# Altium PCB ld_monitoring_decoupling.PcbDoc
Units mm, origin at the board's own origin, x right, y up, seen from the top; angles counter-clockwise.
Board outline 10.25 x 14.75 mm, 4 copper layers (Top Layer, Layer 1 (GND), Layer 2 (PWR), Bottom Layer), stack 0.921 mm thick; 35 components, 26 nets, 110 pads, 54 vias.
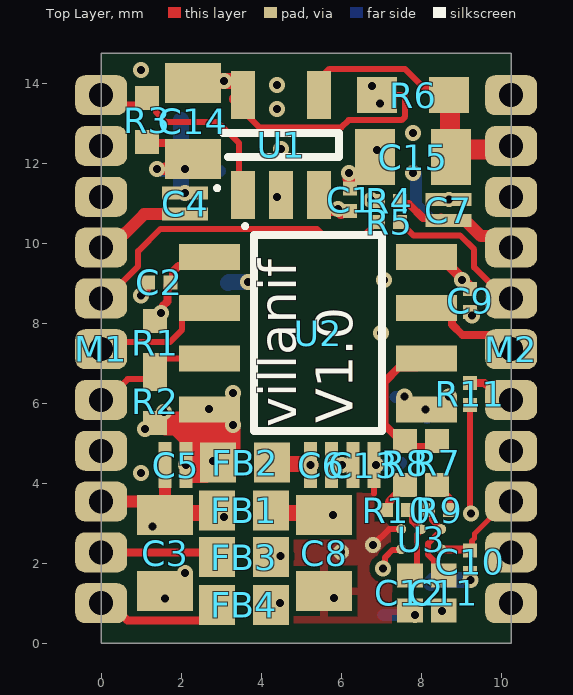
[diagram p0: Top Layer view]
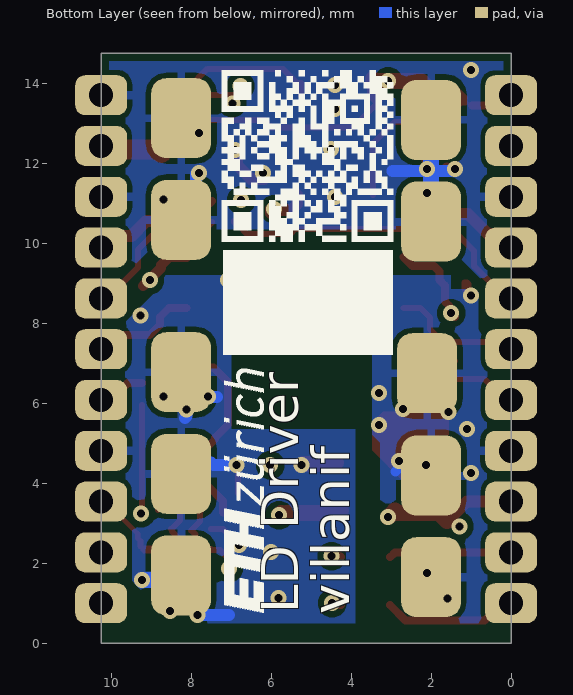
[diagram p1: Bottom Layer view, seen from below]
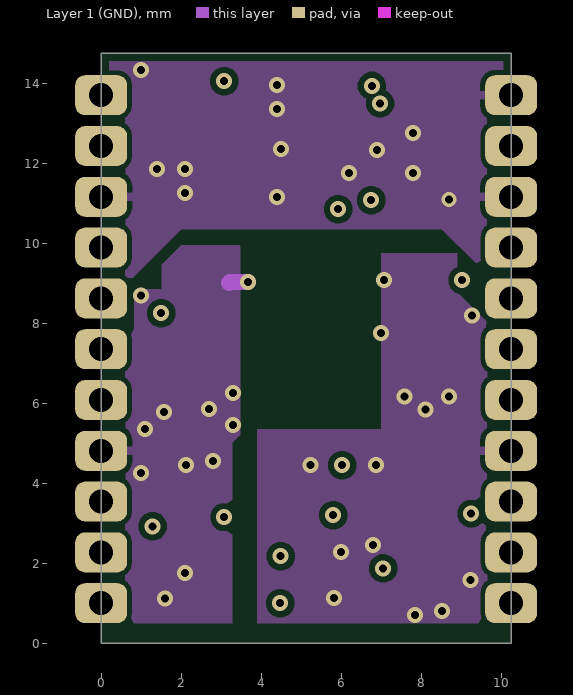
[diagram p2: Layer 1 (GND)]
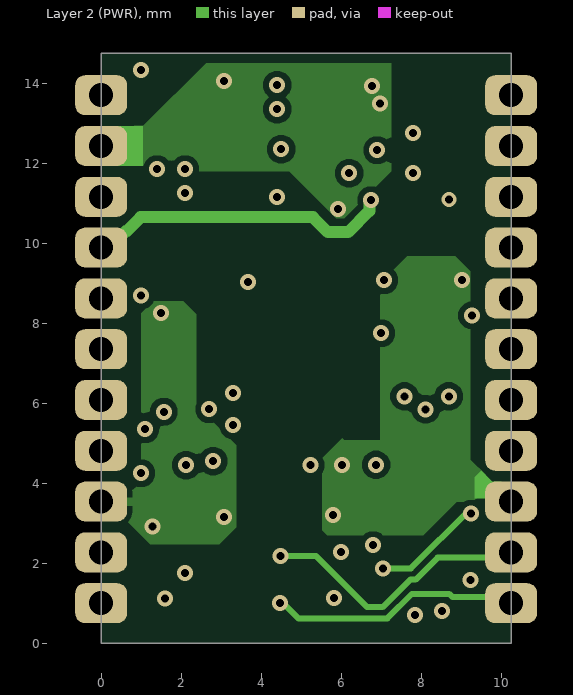
[diagram p3: Layer 2 (PWR)]

## Layer stack, top to bottom
Top Solder: solder mask 0.0127, Solder Resist, Dk 3.8
Top Layer: signal copper 0.035
Dielectric 1: prepreg 0.2104, 7628, Dk 4.5
Layer 1 (GND): signal copper 0.0152
Core: core 0.4, FR-4, Dk 4.5
Layer 2 (PWR): signal copper 0.0152
Dielectric 2: prepreg 0.2104, 7628, Dk 4.5
Bottom Layer: signal copper 0.035
Bottom Solder: solder mask 0.0127, Solder Resist, Dk 3.8

## Board outline
0,0 0,14.75 10.25,14.75 10.25,0

## Design rules (kind name [scope] priority, off if disabled: settings)
AcuteAngle [All] p1: minimum=4.50000000000000E+0001 checktracksonly=FALSE
BoardOutlineClearance [All] p1: gap=0.2 ignorepadtopadclearanceinfootprint=FALSE
Clearance [All] p1: gap=0.12 ignorepadtopadclearanceinfootprint=FALSE except(0.102: Arc-Text Track-Text SMDPad-Text THPad-Text Fill-Text Poly-Text Region-Text Text-Text; 0.127: THPad-Via Via-Text; 0.13: Arc-Arc Arc-Track Arc-SMDPad Track-Track Track-SMDPad SMDPad-SMDPad; 0.15: Arc-Via Track-Via SMDPad-Via Via-Fill Via-Poly Via-Region; 0.2: Arc-THPad Track-THPad SMDPad-THPad THPad-THPad Via-Via; 0.25: Arc-Hole Track-Hole SMDPad-Hole THPad-Hole Via-Hole Fill-Hole Poly-Hole Region-Hole Text-Hole)
ComponentClearance [All] p1: gap=0.102 collisioncheckmode=3 verticalgap=0.102 showdistances=TRUE
DiffPairsRouting [All] p1: maxlimit=0.102 minlimit=0.102 mostfreqgap=0.102 toplayer_minwidth=0.102 toplayer_maxwidth=1816.048 toplayer_prefwidth=0.102 midlayer1_minwidth=0.102 midlayer1_maxwidth=1816.048 midlayer1_prefwidth=0.102 midlayer2_minwidth=0.102 midlayer2_maxwidth=1816.048 midlayer2_prefwidth=0.102 bottomlayer_minwidth=0.102 bottomlayer_maxwidth=1816.048 bottomlayer_prefwidth=0.102 maxuncoupledlength=12.7
Height [All] p1: minheight=0 maxheight=1816.048 prefheight=12.7
HoleSize [All] p1: absolutevalues=TRUE maxlimit=6.3 minlimit=0.2 maxpercent=80.000 minpercent=20.000
HoleToHoleClearance [All] p1: gap=0.25 allowstackedmicrovias=FALSE
MinimumAnnularRing [All] p1: minimumring=0.076
MinimumSolderMaskSliver [All] p1: minsoldermaskwidth=0.1
PlaneClearance [All] p1: clearance=0.102
PlaneConnect PlaneConnectPowerPads [InPadClass('PowerPads')] p1: planeconnectstyle=Direct reliefexpansion=0.508 reliefentries=4 reliefconductorwidth=0.254 reliefairgap=0.254
PlaneConnect [All] p2: pad.planeconnectstyle=Relief pad.reliefexpansion=0.3 pad.reliefentries=4 pad.reliefconductorwidth=0.2 pad.reliefairgap=0.12 via.planeconnectstyle=Direct via.reliefexpansion=0.3 via.reliefentries=4 via.reliefconductorwidth=0.127 via.reliefairgap=0.127
PolygonConnect PolygonConnectPowerPads [All vs (InPadClass('PowerPads'))] p1: connectstyle=Direct reliefconductorwidth=0.254 reliefentries=4 polygonreliefangle="90 Angle" airgapwidth=0.254
PolygonConnect [All] p2: thpad.connectstyle=Relief thpad.reliefconductorwidth=0.2 thpad.reliefentries=4 thpad.polygonreliefangle="90 Angle" thpad.airgapwidth=0.13 smdpad.connectstyle=Relief smdpad.reliefconductorwidth=0.2 smdpad.reliefentries=4 smdpad.polygonreliefangle="90 Angle" smdpad.airgapwidth=0.13 via.connectstyle=Direct via.reliefconductorwidth=0.127 via.reliefentries=4 via.polygonreliefangle="90 Angle" via.airgapwidth=0.127
RoutingVias [All] p1: holewidth=0.2 width=0.45 viastyle="Through Hole" minholewidth=0.2 minwidth=0.35 maxholewidth=6.3 maxwidth=6.55
SilkToSilkClearance [All] p1: silktosilkclearance=0
SilkToSolderMaskClearance [IsPad] p1: minsilkscreentomaskgap=0.05 clearancetoexposedcopper=TRUE
SolderMaskExpansion SolderMaskExpansion_1 [IsVia] p1: expansion=0 istentingtop=TRUE
SolderMaskExpansion [All] p2: expansion=0 istentingtop=FALSE
SupplyNets "Schematic Supply Nets_8" [InNet('3V3_P')] p1: voltage=0.000
SupplyNets "Schematic Supply Nets_7" [InNet('AGND_G')] p2: voltage=0.000
SupplyNets "Schematic Supply Nets_6" [InNet('V5V')] p3: voltage=0.000
SupplyNets "Schematic Supply Nets_5" [InNet('V_LASER_G')] p4: voltage=0.000
SupplyNets "Schematic Supply Nets_4" [InNet('AGND')] p5: voltage=0.000
SupplyNets "Schematic Supply Nets_3" [InNet('3V3_PG')] p6: voltage=0.000
SupplyNets "Schematic Supply Nets_2" [InNet('PGND')] p7: voltage=0.000
SupplyNets "Schematic Supply Nets_1" [InNet('V5V_G')] p8: voltage=0.000
SupplyNets "Schematic Supply Nets" [InNet('V_LASER')] p9: voltage=0.000
Width [All] p1: maxlimit=1816.048 minlimit=0.1 preferedwidth=0.15
20 further rules are at their usual default settings.

## Components (designator, comment, footprint, x,y, rotation, side; value= is the part's Value field where it differs from the comment)
C1 "0.1uF" "CAP 0201_0603" 6.225,11.085 r90 top
C2 "0.1uF" "CAP 0201_0603" 1.45,9.02 r180 top
C3 "4.7uF" "CAP 0805_2012" 1.6,2.25 r90 top
C4 "1uF" FP-LLL152-0_2-MFG 2.1,10.987 r270 top
C5 "1uF" FP-LLL152-0_2-MFG 1.862,4.45 r180 top
C6 "1uF" FP-LLL152-0_2-MFG 5.5,4.45 r0 top
C7 "1uF" FP-LLL152-0_2-MFG 8.681,10.828 r270 top
C8 "4.7uF" "CAP 0805_2012" 5.575,2.25 r90 top
C9 "0.1uF" "CAP 0201_0603" 9.222,8.563 r90 top
C10 "0.1uF" "CAP 0201_0603" 9.225,2.035 r90 top
C11 "20 pF" "CAP 0402_1005" 8.562,1.255 r90 top
C12 "20 pF" "CAP 0402_1005" 7.72,1.255 r90 top
C13 "1uF" FP-LLL152-0_2-MFG 6.562,4.45 r180 top
C14 "4.7uF" "CAP 0805_2012" 2.3,13.05 r90 top
C15 "4.7uF" "CAP 0805_2012" 7.8,12.15 r0 top
FB1 "1 kOhms @ 100 MHz" "FER 0603_1608" 3.575,3.312 r0 top
FB2 "1 kOhms @ 100 MHz" "FER 0603_1608" 3.6,4.512 r0 top
FB3 "1 kOhms @ 100 MHz" "FER 0603_1608" 3.575,2.15 r0 top
FB4 "1 kOhms @ 100 MHz" "FER 0603_1608" 3.575,0.95 r0 top
M1 "Castellated_11" Castellated_ 0,7.35 r180 top
M2 "Castellated_11" Castellated_ 10.25,7.35 r0 top
R1 "4.99 k" "RES 0402_1005" 1.35,7.5 r90 top
R2 "4.99 k" "RES 0402_1005" 1.35,6.05 r90 top
R3 "10k" "RES 0402_1005" 1.15,13.075 r90 top
R4 "0" "RES 0201_0603" 7.2,11.05 r0 top
R5 "0" "RES 0201_0603" 7.197,10.528 r0 top
R6 "33mR" "STACKPOLE CSR0603" 7.8,13.7 r180 top
R7 "0" "RES 0402_1005" 8.4,4.5 r270 top
R8 "0" "RES 0402_1005" 7.6,4.5 r270 top
R9 "4.99 k" "RES 0201_0603" 8.45,3.325 r180 top
R10 "4.99 k" "RES 0201_0603" 7.4,3.325 r0 top
R11 "24" "RES 0201_0603" 9.225,6.225 r90 top
U1 "INA139NA_3K" SOT95P280X145-5N 4.5,12.45 r90 top
U2 "MAX22291CASA_V+" SOIC127P600X175-8N 5.425,7.75 r0 top
U3 "SN74LVC1G08YZPR" YZP0005ADAD 8,2.6 r270 top

## Footprints (in the part's own frame and the unit in brackets; to place one, negate y for a bottom-side part, rotate by r counter-clockwise, add the part's x,y. Pads: shape width x height; smd on the part's side, far side on the other; paste and mask are expansions set on the pad)
"CAP 0201_0603" [mm] "Chip Capacitor, 2-Leads, Body 0.60x0.30mm, IPC Medium Density"
  rect 0.35x0.35 smd: 1(-0.285,0) 2(0.285,0)
  body extent -0.3,-0.15 0.3,0.15, height 0.3
"CAP 0402_1005" [mm] "Chip Capacitor, 2-Leads, Body 1.02x0.51mm, IPC Medium Density"
  rect 0.6x0.64 smd: 1(-0.44,0) 2(0.44,0)
  body extent -0.5,-0.26 0.5,0.26, height 0.52
"CAP 0805_2012" [mm] "Chip Capacitor, 2-Leads, Body 2.00x1.20mm, IPC Medium Density"
  rect 1x1.4 smd: 1(-0.95,0) 2(0.95,0)
  body extent -1,-0.64 1,0.64, height 1.26
Castellated_ [mm] "Castellated holes, 11 pin, 0.6 mm hole diameter, 1.27 mm pitch"
  rrect50% 1.3x1 hole 0.6: 1(0,6.35) 2(0,5.08) 3(0,3.81) 4(0,2.54) 5(0,1.27) 6(0,0) 7(0,-1.27) 8(0,-2.54) 9(0,-3.81) 10(0,-5.08) 11(0,-6.35)
  body extent -0.35,-6.85 0,6.85
"FER 0603_1608" [mm] "Chip Ferrite, 2-Leads, Body 1.60x0.80mm, IPC Medium Density"
  rect 0.9x1 smd: 1(-0.675,0) 2(0.675,0)
  body extent -0.8,-0.41 0.8,0.41, height 0.82
FP-LLL152-0_2-MFG [mm]
  rect 0.325x1.15 smd paste+0 mask+0: 1(-0.262,0) 2(0.262,0)
  body extent -0.53,-0.7 0.53,0.7, height 0.25
"RES 0201_0603" [mm] "Chip Resistor, 2-Leads, Body 0.60x0.30mm, IPC Medium Density"
  rect 0.35x0.35 smd: 1(-0.275,0) 2(0.275,0)
  body extent -0.3,-0.15 0.3,0.15, height 0.21
"RES 0402_1005" [mm] "Chip Resistor, 2-Leads, Body 1.0x0.5mm, IPC Medium Density"
  rect 0.6x0.6 smd: 1(-0.55,0) 2(0.55,0)
  body extent -0.5,-0.25 0.5,0.25, height 0.35
SOIC127P600X175-8N [mm]
  rect 1.525x0.65 smd: 1(-2.712,1.905) 2(-2.712,0.635) 3(-2.712,-0.635) 4(-2.712,-1.905) 5(2.712,-1.905) 6(2.712,-0.635) 7(2.712,0.635) 8(2.712,1.905)
  silkscreen extent -1.87,-2.45 1.6,2.72, body extent -3,-2.45 3,2.45, height 1.75
SOT95P280X145-5N [mm]
  rect 1.2x0.6 smd: 1(-1.25,0.95) 2(-1.25,0) 3(-1.25,-0.95) 4(1.25,-0.95) 5(1.25,0.95)
  silkscreen extent -1.12,-1.45 0.3,1.65, body extent -1.4,-1.45 1.4,1.45, height 1.2
"STACKPOLE CSR0603" [mm] "Chip Resistor, 2-Leads, Body 1.60x0.80mm, IPC Medium Density"
  rect 1x0.9 smd: 1(-0.9,0) 2(0.9,0)
  body extent -0.85,-0.4 0.85,0.4, height 0.45
YZP0005ADAD [mm] "BGA, 5-Balls, Body 1.39x0.89mm, Pitch 0.5mm"
  round 0.25 smd mask+0.03: A1(-0.25,0.5) A2(0.25,0.5) B1(-0.25,0) C1(-0.25,-0.5) C2(0.25,-0.5)
  body extent -0.45,-0.69 0.45,0.69, height 0.5

## Part data
C1 C2 C9 C10: library part GRM033R6YA104ME14D, "CAP CER 0.1UF 35V X5R 0201", Capacitance="0.1 µF", Device Package="0201 (0603 Metric)", Manufacturer="Murata Electronics", Operating Temperature="-55°C ~ 85°C", Supplier Part Number 1=490-10431-1-ND, Temperature Coefficient=X5R, Tolerance=±20%, Voltage - Rated=35V, Applications="General Purpose", ComponentLink1Description=Datasheet, ComponentLink1URL=https://search.murata.co.jp/Ceramy/image/img/A01X/G101/ENG/GRM033R6YA104ME14-01.pdf, ComponentLink2Description="DigiKey Link", ComponentLink2URL=https://www.digikey.com/en/products/detail/murata-electronics/GRM033R6YA104ME14D/5027516, lastupdated="15/07/2023 19:00:56", Lifecycle Status=Active, Minimum Order=1, Mounting Type="Surface Mount", Package / Case="0201 (0603 Metric)", Packaging=CutTape, Part Number=GRM033R6YA104ME14D, Part Status=Active, partid=17, price=0.01, series=GRM, Size / Dimension="0.024\" L x 0.012\" W (0.60mm x 0.30mm)", Supplier 1=Digi-Key, Supplier 2=Mouser, Supplier Part Number 2=81-GRM33R6YA104ME14D, Thickness (Max)="0.013\" (0.33mm)"
C3 C8 C14 C15: library part GRM21BC81H475KE11L, "CAP CER 4.7UF 50V X6S 0805", Capacitor Type=Ceramic, Case/Package=0805, Manufacturer=Murata, Max Operating Temperature=105°C, Min Operating Temperature=-55°C, Package Shape=Rectangular, Package Style=SMTMeter, Rated DC Voltage (URdc)=50V, Supplier Part Number=81-GRM21BC81H475KE1L, Supplier Part Number 1=81-GRM21BC81H475KE1K, Temperature Characteristics Code=X6S, Tolerance  (fill in as +-)=10%, Category="Ceramic Capacitors", ComponentLink1Description=https://datasheet.ciiva.com:443/pdfs/VipMasterIC/IC/MURE/MURE-S-A0004349797/MURE-S-A0004361772-1.pdf?src-supplier=IHS+Markit, ComponentLink1URL=https://datasheet.ciiva.com:443/pdfs/VipMasterIC/IC/MURE/MURE-S-A0004349797/MURE-S-A0004361772-1.pdf?src-supplier=IHS+Markit, ComponentLink2Description=http://www.mouser.com/ds/2/281/c02e-2905.pdf?src-supplier=Mouser, ComponentLink2URL=http://www.mouser.com/ds/2/281/c02e-2905.pdf?src-supplier=Mouser, ComponentLink3Description=http://search.murata.co.jp/Ceramy/image/img/A01X/G101/ENG/GRM21BC81H475KE11-01.pdf?src-supplier=Digi-Key, ComponentLink3URL=http://search.murata.co.jp/Ceramy/image/img/A01X/G101/ENG/GRM21BC81H475KE11-01.pdf?src-supplier=Digi-Key, ComponentLink4Description=https://search.murata.co.jp/Ceramy/image/img/A01X/G101/ENG/GRM21BC81H475KE11-01.pdf?src-supplier=Digi-Key, ComponentLink4URL=https://search.murata.co.jp/Ceramy/image/img/A01X/G101/ENG/GRM21BC81H475KE11-01.pdf?src-supplier=Digi-Key, Dielectric Material=Ceramic, Height=1.25mm, JESD-609 Code=e3, Length=2mm, Manufacturer Part Number=GRM21BC81H475KE11L, Mounting Technology="Surface Mount", Multilayer=Yes, Packaging="Tape and Reel", Pins=2, Pricing="1=0.29, 10=0.141, 50=0.141, 100=0.091, 1000=0.077, 10000=0.062 (USD)", Reach SVHC Compliant=Yes, RoHS=Yes, RoHS Compliant=Yes, Stock=22290, Supplier=Mouser, Supplier 1=Mouser, Terminal Finish=Nickel, Termination=Wraparound, Tolerance (fill in as +-)=10%, Width=1.25mm
C4 C5 C6 C7 C13: library part LLL152D70J105ME01D, "CAP LOW L CER 1UF 6.3V X7T 0204", Manufacturer=Murata, Supplier Part Number=81-LLL152D70J105ME01, Category="Ceramic Capacitors", Manufacturer Part Number=LLL152D70J105ME01D, Pricing="1=0.32, 10=0.173, 50=0.173, 100=0.104, 1000=0.08, 10000=0.06 (USD)", RoHS=No, Stock=241363, Supplier=Mouser, Supplier 1=Mouser, Supplier Part Number 1=81-LLL152D70J105ME01
C11 C12: library part GCM1555C1H200FA16D, "CAP CER 20PF 50V C0G/NP0 0402", Device Package="0402 (1005 Metric)", Manufacturer="Murata Electronics", Operating Temperature="-55°C ~ 125°C", Ratings=AEC-Q200, Supplier Part Number 1=490-GCM1555C1H200FA16DCT-ND, Temperature Coefficient="C0G, NP0", Tolerance=±1%, Voltage - Rated=50V, Applications=Automotive, Capacitance="20 pF", ComponentLink1Description=Datasheet, ComponentLink1URL=https://search.murata.co.jp/Ceramy/image/img/A01X/G101/ENG/GCM1555C1H200FA16-01.pdf, ComponentLink2Description="DigiKey Link", ComponentLink2URL=https://www.digikey.com/en/products/detail/murata-electronics/GCM1555C1H200FA16D/13401847, lastupdated="15/07/2023 19:03:20", Lifecycle Status=Active, Minimum Order=1, Mounting Type="Surface Mount, MLCC", Package / Case="0402 (1005 Metric)", Packaging=TapeAndReel, Part Number=GCM1555C1H200FA16D, Part Status=Active, partid=45712, price=0.01, series=GCM, Size / Dimension="0.039\" L x 0.020\" W (1.00mm x 0.50mm)", Supplier 1=Digi-Key, Supplier 2=Mouser, Supplier Part Number 2=81-GCM1555C1H200FA6D, Thickness (Max)="0.022\" (0.55mm)"
FB1 FB2 FB3 FB4: library part BLM18SP102SH1D, "FERRITE BEAD 1K OHM 0603 1LN", Current Rating (Max)=1.2A, DC Resistance (DCR) (Max)=185mOhm, Device Package="0603 (1608 Metric)", Manufacturer="Murata Electronics", Operating Temperature="-55°C ~ 125°C", Ratings=AEC-Q200, Supplier Part Number 1=490-BLM18SP102SH1DCT-ND, ComponentLink1Description=Datasheet, ComponentLink1URL=https://www.murata.com/products/productdata/8796737273886/QNFA9101.pdf, ComponentLink2Description="DigiKey Link", ComponentLink2URL=https://www.digikey.com/en/products/detail/murata-electronics/BLM18SP102SH1D/12759403, Filter Type="Power Line", Height (Max)="0.037\" (0.95mm)", Impedance @ Frequency="1 kOhms @ 100 MHz", lastupdated="13/07/2023 19:55:34", Lifecycle Status=Active, Minimum Order=1, Mounting Type="Surface Mount", Number of Lines=1, Package / Case="0603 (1608 Metric)", Packaging=TapeAndReel, Part Number=BLM18SP102SH1D, Part Status=Active, partid=2122, price=0.05, series=BLM, Size / Dimension="0.063\" L x 0.031\" W (1.60mm x 0.80mm)", Supplier 1=Digi-Key, Supplier 2=Mouser, Supplier Part Number 2=81-BLM18SP102SH1D
M1 M2: "Castellated holes, 11 pin, 0.6 mm hole diameter, 1.27 mm pitch"
R1 R2: library part ERA-2AEB4991X, "RES SMD 4.99KOHM 0.1% 1/16W 0402", Device Package="0402 (1005 Metric)", Manufacturer="Panasonic Electronic Components", Operating Temperature="-55°C ~ 155°C", Power (Watts)="0.063W, 1/16W", Ratings=AEC-Q200, Resistance="4.99 kOhms", Supplier Device Package=0402, Supplier Part Number 1=10-ERA-2AEB4991XCT-ND, Temperature Coefficient=±25ppm/°C, Tolerance=±0.1%, ComponentLink1Description=Datasheet, ComponentLink1URL=https://industrial.panasonic.com/cdbs/www-data/pdf/RDM0000/AOA0000C307.pdf, ComponentLink2Description="DigiKey Link", ComponentLink2URL=https://www.digikey.com/en/products/detail/panasonic-electronic-components/ERA-2AEB4991X/2026116, Composition="Thin Film", Features="Automotive AEC-Q200", Height - Seated (Max)="0.016\" (0.40mm)", lastupdated="13/07/2023 19:22:52", Lifecycle Status=Active, Minimum Order=1, Number of Terminations=2, Package / Case="0402 (1005 Metric)", Packaging=TapeAndReel, Part Number=ERA-2AEB4991X, Part Status=Active, partid=6112, price=0.04, series=ERA-2A, Size / Dimension="0.039\" L x 0.020\" W (1.00mm x 0.50mm)", Supplier 1=Digi-Key, Supplier 2=Mouser, Supplier Part Number 2=667-ERA-2AEB4991X
R3: library part ERJ-1GNF1002C, "RES SMD 10KOHM 0.1% 63mW 0402", Case/Package=0402, Manufacturer=Panasonic, Manufacturer Part Number=ERA-2AEB103X, Max Operating Temperature=155°C, Min Operating Temperature=-55°C, Package Height=0.35mm, Package Length=1mm, Package Style=SMTMeter, Package Width=0.5mm, Power=63mW, Rated Temperature=85°C, Resistor Type="FIXED RESISTOR", Supplier Part Number 1=667-ERA-2AEB103X, Temperature Coefficient=25ppm/°C, Tolerance=0.1%, Working Voltage=25V, Category="Chip SMD Resistors", ComponentLink1Description=https://datasheet.ciiva.com:443/pdfs/VipMasterIC/IC/PANA/PANA-S-A0009459258/PANA-S-A0009459258-1.pdf?src-supplier=IHS+Markit, ComponentLink1URL=https://datasheet.ciiva.com:443/pdfs/VipMasterIC/IC/PANA/PANA-S-A0009459258/PANA-S-A0009459258-1.pdf?src-supplier=IHS+Markit, ComponentLink2Description=https://datasheet.ciiva.com/46398/328837-46398998.pdf?src-supplier=Element14, ComponentLink2URL=https://datasheet.ciiva.com/46398/328837-46398998.pdf?src-supplier=Element14, ComponentLink3Description=https://datasheet.ciiva.com/5838/328837-5838011.pdf?src-supplier=Farnell, ComponentLink3URL=https://datasheet.ciiva.com/5838/328837-5838011.pdf?src-supplier=Farnell, ComponentLink4Description=https://datasheet.ciiva.com/9116/aoa0000ce26-9116649.pdf?src-supplier=Avnet, ComponentLink4URL=https://datasheet.ciiva.com/9116/aoa0000ce26-9116649.pdf?src-supplier=Avnet, ComponentLink5Description=https://datasheet.ciiva.com/30213/54aoa0000ce26-30213096.pdf?src-supplier=Onlinecomponents.com, ComponentLink5URL=https://datasheet.ciiva.com/30213/54aoa0000ce26-30213096.pdf?src-supplier=Onlinecomponents.com, Construction=Rectangular, JESD-609 Code=e3, Mounting Technology="Surface Mount", Packaging="Tape and Reel", Pins=2, Pricing 1="1=0.39, 10=0.153, 50=0.153, 100=0.077, 1000=0.056, 10000=0.051 (USD)", Reach SVHC Compliant=Yes, Reference Standard=AEC-Q200, RoHS=Yes, RoHS Compliant=Yes, Stock 1=679779, Supplier 1=Mouser, Technology="THIN FILM", Terminal Finish=Nickel, Termination=Wraparound
R4 R5: library part ERJ-1GN0R00C, "RES SMD 0OHM 0.1% 1/20W 0201", Case/Package=0201, Manufacturer=Panasonic, Max Operating Temperature=125°C, Min Operating Temperature=-55°C, Package Height=0.23mm, Package Length=0.6mm, Package Shape=Rectangular, Package Style=SMTMeter, Package Width=0.3mm, Power=50mW, Rated Temperature=70°C, Resistor Type="FIXED RESISTOR", Supplier Part Number=667-ERJ-1GN0R00C, Category="Chip SMD Resistors", ComponentLink1Description=https://datasheet.ciiva.com:443/pdfs/VipMasterIC/IC/PANA/PANA-S-A0009459603/PANA-S-A0009459603-1.pdf?src-supplier=IHS+Markit, ComponentLink1URL=https://datasheet.ciiva.com:443/pdfs/VipMasterIC/IC/PANA/PANA-S-A0009459603/PANA-S-A0009459603-1.pdf?src-supplier=IHS+Markit, Construction=Rectangular, JESD-609 Code=e3, Manufacturer Part Number=ERJ-1GN0R00C, Mounting Technology="Surface Mount", Packaging="Tape and Reel", Pins=2, Pricing="1=0.1, 10=0.018, 50=0.018, 100=0.008, 1000=0.006, 10000=0.004 (USD)", Reach SVHC Compliant=Yes, Reference Standard=AEC-Q200, RoHS=Yes, RoHS Compliant=Yes, Stock=4285208, Supplier=Mouser, Supplier 1=Mouser, Supplier Part Number 1=667-ERJ-1GN0R00C, Technology="METAL GLAZE/THICK FILM", Terminal Finish=Nickel, Termination=Wraparound
R6: library part RL0816T-R033-F, "RES 0.033 OHM 1% 1/4W 0603", Case/Package=0603, Manufacturer=Susumu, Max Operating Temperature=125°C, Min Operating Temperature=-55°C, Package Height=0.45mm, Package Length=1.6mm, Package Shape=Rectangular, Package Width=0.8mm, Power=250mW, Rated Temperature=70°C, Resistor Type="FIXED RESISTOR", Temperature Coefficient (ppm/Cel)=350, Tolerance=1%, Category="Chip SMD Resistors", ComponentLink1Description=https://datasheet.ciiva.com:443/pdfs/VipMasterIC/IC/SUSU/SUSU-S-A0004662802/SUSU-S-A0004662802-1.pdf?src-supplier=IHS+Markit, ComponentLink1URL=https://datasheet.ciiva.com:443/pdfs/VipMasterIC/IC/SUSU/SUSU-S-A0004662802/SUSU-S-A0004662802-1.pdf?src-supplier=IHS+Markit, ComponentLink2Description=https://datasheet.ciiva.com/2502/e-15-16-2502058.pdf?src-supplier=Digikey, ComponentLink2URL=https://datasheet.ciiva.com/2502/e-15-16-2502058.pdf?src-supplier=Digikey, ComponentLink3Description=https://datasheet.ciiva.com/2502/e-15-16-2502059.pdf?src-supplier=Digikey, ComponentLink3URL=https://datasheet.ciiva.com/2502/e-15-16-2502059.pdf?src-supplier=Digikey, ComponentLink4Description=https://datasheet.ciiva.com/12915/e-15-16-12915349.pdf?src-supplier=Mouser, ComponentLink4URL=https://datasheet.ciiva.com/12915/e-15-16-12915349.pdf?src-supplier=Mouser, ComponentLink5Description=https://datasheet.ciiva.com/2502/rl-data-sheet-2502057.pdf?src-supplier=Digikey, ComponentLink5URL=https://datasheet.ciiva.com/2502/rl-data-sheet-2502057.pdf?src-supplier=Digikey, Construction=Chip, JESD-609 Code=e3, Manufacturer Part Number=RL0816T-R033-F, Mounting Technology="Surface Mount", Pins=2, Pricing 1="1=0.3, 10=0.192, 50=0.144, 100=0.128, 1000=0.082, 10000=0.06 (USD)", Reach SVHC Compliant=Yes, RoHS=Yes, RoHS Compliant=Yes, Stock 1=9602, Supplier 1=Mouser, Technology="THIN FILM", Terminal Finish=Tin, Termination=Wraparound
R7 R8: library part ERJ-S020R00X, "RES SMD 0OHM 1/10W 0402", Case/Package=0402, Manufacturer=Panasonic, Max Operating Temperature=155°C, Min Operating Temperature=-55°C, Package Height=0.35mm, Package Length=1mm, Package Shape=Rectangular, Package Style=SMTMeter, Package Width=0.5mm, Power=100mW, Rated Temperature=70°C, Resistor Type="FIXED RESISTOR", Supplier Part Number 1=667-ERJ-S020R00X, Category="Chip SMD Resistors", ComponentLink1Description=https://datasheet.ciiva.com:443/pdfs/VipMasterIC/IC/PANA/PANA-S-A0008969865/PANA-S-A0008969865-1.pdf?src-supplier=IHS+Markit, ComponentLink1URL=https://datasheet.ciiva.com:443/pdfs/VipMasterIC/IC/PANA/PANA-S-A0008969865/PANA-S-A0008969865-1.pdf?src-supplier=IHS+Markit, ComponentLink2Description=https://datasheet.ciiva.com/24051/aoa0000ce5-24051112.pdf?src-supplier=Mouser, ComponentLink2URL=https://datasheet.ciiva.com/24051/aoa0000ce5-24051112.pdf?src-supplier=Mouser, Construction=Rectangular, JESD-609 Code=e3, Manufacturer Part Number=ERJ-S020R00X, Mounting Technology="Surface Mount", Packaging="Tape and Reel", Pins=2, Pricing 1="1=0.25, 10=0.09, 50=0.09, 100=0.057, 1000=0.041, 10000=0.031 (USD)", Reach SVHC Compliant=Yes, Reference Standard=IEC, RoHS=Yes, RoHS Compliant=Yes, Stock 1=388028, Supplier 1=Mouser, Technology="METAL GLAZE/THICK FILM", Terminal Finish=Tin, Termination=Wraparound
R9 R10: library part ERJ-1GNF4991C, "RES SMD 4.99 kOHM 1% 1/20W 0201", Manufacturer=Panasonic, Supplier Part Number=667-ERJ-1GNF4991C, Category="Chip SMD Resistors", ComponentLink1Description=https://datasheet.ciiva.com/24210/aoa0000ce2-24210761.pdf?src-supplier=Mouser, ComponentLink1URL=https://datasheet.ciiva.com/24210/aoa0000ce2-24210761.pdf?src-supplier=Mouser, Manufacturer Part Number=ERJ-1GNF4991C, Pricing="1=0.1, 10=0.033, 50=0.033, 100=0.015, 1000=0.011, 10000=0.007 (USD)", RoHS=Yes, Stock=73903, Supplier=Mouser, Supplier 1=Mouser, Supplier Part Number 1=667-ERJ-1GNF4991C
R11: library part ERJ-1GNF24R0C, "RES SMD 24 OHM 1% 1/20W 0201", Case/Package=0201, Manufacturer=Panasonic, Max Operating Temperature=125°C, Min Operating Temperature=-55°C, Package Height=0.23mm, Package Length=0.6mm, Package Shape=Rectangular, Package Style=SMTMeter, Package Width=0.3mm, Power=50mW, Rated Temperature=70°C, Resistor Type="FIXED RESISTOR", Supplier Part Number 1=667-ERJ-1GNF24R0C, Temperature Coefficient=200ppm/°C, Tolerance=1%, Working Voltage=25V, Category="Chip SMD Resistors", ComponentLink1Description=https://datasheet.ciiva.com:443/pdfs/VipMasterIC/IC/PANA/PANA-S-A0009889626/PANA-S-A0009889626-1.pdf?src-supplier=IHS+Markit, ComponentLink1URL=https://datasheet.ciiva.com:443/pdfs/VipMasterIC/IC/PANA/PANA-S-A0009889626/PANA-S-A0009889626-1.pdf?src-supplier=IHS+Markit, ComponentLink2Description=https://datasheet.ciiva.com/46440/1678782-46440365.pdf?src-supplier=Element14, ComponentLink2URL=https://datasheet.ciiva.com/46440/1678782-46440365.pdf?src-supplier=Element14, ComponentLink3Description=https://datasheet.ciiva.com/7861/aoa0000ce2-7861836.pdf?src-supplier=Element14, ComponentLink3URL=https://datasheet.ciiva.com/7861/aoa0000ce2-7861836.pdf?src-supplier=Element14, ComponentLink4Description=https://datasheet.ciiva.com/43467/1678782-43467015.pdf?src-supplier=Farnell, ComponentLink4URL=https://datasheet.ciiva.com/43467/1678782-43467015.pdf?src-supplier=Farnell, Construction=Rectangular, JESD-609 Code=e3, Manufacturer Part Number=ERJ-1GNF24R0C, Mounting Technology="Surface Mount", Packaging="Tape and Reel", Pins=2, Pricing 1="1=0.1, 10=0.023, 50=0.023, 100=0.014, 1000=0.01, 10000=0.007 (USD)", Reach SVHC Compliant=Yes, Reference Standard=AEC-Q200, RoHS=Yes, RoHS Compliant=Yes, Stock 1=78378, Supplier 1=Mouser, Technology="METAL GLAZE/THICK FILM", Terminal Finish=Nickel, Termination=Wraparound
U1: "IC Inamp high-side current monitor", Average Bias Current-Max (IIB)=10uA, Case/Package=LSSOP, Input Offset Voltage-Max=1mV, Manufacturer="Texas Instruments", Manufacturer Part Number=INA139NA/3K, Max Operating Temperature=125°C, Min Operating Temperature=-40°C, Nominal Supply Voltage=5V, Package Body Material=Plastic, Package Equivalence Code=TSSOP14,.25, Package Shape=Rectangular, Package Style="SMALL OUTLINE, LOW PROFILE, SHRINK PITCHMeter", Peak Reflow Temperature (Cel)=260°C, Supplier Part Number 1=595-INA139NA/3K, Supply Voltage Limit-Max=60V, Temperature Grade=AUTOMOTIVE, Voltage Gain-Max=100, Voltage Gain-Min=1, Amplifier Type="INSTRUMENTATION AMPLIFIER", Bandwidth (3dB)-Nom=440kHz, Category="Amplifiers - Op Amps, Buffer, Instrumentation", Channels=1, Common Mode Rejection Ratio-Min=100dB, ComponentLink1Description=https://www.ti.com:443/lit/ds/symlink/ina139.pdf?src-supplier=IHS+Markit, ComponentLink1URL=https://www.ti.com:443/lit/ds/symlink/ina139.pdf?src-supplier=IHS+Markit, ComponentLink2Description=https://datasheet.ciiva.com/15128/getdatasheetpartid-248784-15128606.pdf?src-supplier=Verical, ComponentLink2URL=https://datasheet.ciiva.com/15128/getdatasheetpartid-248784-15128606.pdf?src-supplier=Verical, ComponentLink3Description=https://datasheet.ciiva.com/1939/ina139-1939993.pdf?src-supplier=Digi-Key, ComponentLink3URL=https://datasheet.ciiva.com/1939/ina139-1939993.pdf?src-supplier=Digi-Key, ComponentLink4Description=https://datasheet.ciiva.com/2976/ina169-2976115.pdf?src-supplier=Avnet, ComponentLink4URL=https://datasheet.ciiva.com/2976/ina169-2976115.pdf?src-supplier=Avnet, ComponentLink5Description=https://datasheet.ciiva.com/1939/ina139-1939992.pdf?src-supplier=Digi-Key, ComponentLink5URL=https://datasheet.ciiva.com/1939/ina139-1939992.pdf?src-supplier=Digi-Key, ComponentLink6Description=https://datasheet.ciiva.com/1939/ina139-1939994.pdf?src-supplier=Digi-Key, ComponentLink6URL=https://datasheet.ciiva.com/1939/ina139-1939994.pdf?src-supplier=Digi-Key, Height - Seated (Max)=1.45mm, JESD-30 Code=R-PDSO-G5, JESD-609 Code=e4, Length=2.9mm, Moisture Sensitivity Level=2, Non-linearity-Max=0.1%, Packaging="Tape and Reel", Pins=5, Pricing 1="1=1.5, 10=1.27, 50=1.27, 100=1.02, 1000=0.737, 10000=0.736 (USD)", Qualification Status="Not Qualified", Reach SVHC Compliant=Yes, RoHS=Yes, RoHS Compliant=Yes, Stock 1=21999, Supplier 1=Mouser, Surface Mount=Yes, Terminal Finish=Nickel, Terminal Form="Gull Wing", Terminal Pitch=0.95mm, Terminal Position=DUAL, Width=1.6mm
U2: "IC Digital Isolator, 2CH", Manufacturer=Maxim, Manufacturer Part Number=MAX22291CASA/V+, Supplier Part Number 1=700-MAX22291CASA/V+, Category=Uncategorized, Pricing 1="1=3.43, 10=2.91, 50=2.91, 100=2.52, 1000=1.85, 10000=1.71 (USD)", RoHS=No, Stock 1=7613, Supplier 1=Mouser
U3: "IC Single 2-Input Positive-AND Gate, YZP0005ADAD, LARGE T&R", F @ Nom Voltage(Max)(Mhz)=150, Generic Part Number=SN74LVC1G08, ICC @ Nom Voltage(Max)(mA)=0.01, Manufacturer="Texas Instruments", Operating Temperature Range(C)="-40 to 125,-40 to 85", Rating=Catalog, Supplier Part Number 1=595-SN74LVC1G08YZPR, tpd @ Nom Voltage(Max)(ns)=4.5,6,4,5, Voltage(Nom)(V)=1.8,2.5,3.3,5, 3-State Output=No, Bits(#)=1, DatasheetVersion=SCES217Y, Gate Type=AND, Input Type=CMOS/TTL, Logic=True, Manufacturer Part Number=SN74LVC1G08YZPR, Output Drive (IOL/IOH)(Max)(mA)=32/-32, Output Type=CMOS, PackageReference=YZP0005ADAD, Schmitt Trigger=No, Sub-Family="AND Gate", Supplier 1=Mouser, Technology Family=LVC, VCC(Max)(V)=5.5, VCC(Min)(V)=1.65

## Free pads (board coordinates)
  rrect50% 1.5x2 smd far side: 1(2,1.65) 1(2,4.19) 1(2,10.54) 1(2,13.08) 1(2.1,6.75) 1(8.25,1.695) 1(8.25,4.235) 1(8.25,6.775) 1(8.25,10.585) 1(8.25,13.125)

## Via types
v1: diameter 0.4, hole 0.2, Top Layer to Bottom Layer, tented both sides, 53 vias
v2: diameter 0.37, hole 0.2, Top Layer to Bottom Layer, tented both sides, 1 vias

## Nets (pads, with @x,y where several pads share a name; then routed paths per layer and width w, separated by ;. In a path a pad name is that pad's centre, name@x,y a point inside that pad or via, vN(x,y) a via of type N, cw(c..) or ccw(c..) an arc to the next point about the centre after c; other vN are vias at no path point)
3V3_P: C7.2 M2.4 R4.2 | length 2.9
  Top Layer w0.2: R4.2 7.55,10.975 7.7,10.975 8.047,10.628 8.46,10.628 C7.2@8.5,10.587
  Top Layer w0.3: C7.2@8.5,10.587 8.535,10.553 9.119,10.553 9.493,10.178 M2.4@10.007,10.178
3V3_PG: C4.2 M1.8 R4.1 | length 9.9
  Top Layer w0.3: M1.8@0.204,9.89 0.554,10.24 0.59,10.24 1.075,10.725 C4.2
  Layer 2 (PWR) w0.3: M1.8 0.204,9.89 0.624,10.31 0.649,10.31 0.989,10.65 5.293,10.65 5.669,10.274 6.172,10.274 6.705,10.807 6.705,11.056 v1@6.724,11.075
  other v1: 6.749,11.075
AGND: C6.1 C8.1 C9.1 C10.1 C11.1 C12.1 C13.1 FB2.2 M2.8 pad.1@8.25,1.695 pad.1@8.25,4.235 pad.1@8.25,6.775 U2.5 U3.C1 | length 5.6
  Top Layer w0.15: v1@6.806,2.456 7.2,2.85 U3.C1 ; 6.825,3.745 C13.1 6.864,4.45 v1(6.872,4.457) ; C9.1@9.225,8.34 9.225,8.193 v1(9.27,8.193)
  Top Layer w0.4: FB2.2@4.375,4.512 4.406,4.481 5.206,4.481 v1(5.238,4.45)
  Bottom Layer w0.3: v1(6.872,4.457) 7.446,4.457 7.5,4.511 ; 7.049,0.704 v1(7.841,0.704) ; 7.361,6.151 7.563,6.151 v1(7.582,6.17) ; v1(8.112,5.845) 8.112,5.673 8.15,5.635
  Bottom Layer w0.4: pad.1@8.25,1.5 8.326,1.576 v1(9.233,1.576)
  other v1: 8.525,0.81 5.818,1.131 6,2.275 6.8,2.45 8.69,6.17 7,7.75 7.075,9.075
AGND_G: C2.2 C3.1 C5.1 FB2.1 M1.4 pad.1@2,1.65 pad.1@2,4.19 pad.1@2.1,6.75 R2.1 U2.4 | length 2
  Top Layer w0.15: v1(1,8.696) 1,8.737 1,8.764 1.065,8.829 1.065,8.92 1.115,8.97 C2.2
  Top Layer w0.25: v1@1,8.737 1.115,8.852 C2.2@1.115,8.97
  Layer 1 (GND) w0.4: 3.2,9 3.225,9.025 v1(3.675,9.025)
  Bottom Layer w0.25: v1(2.8,4.55) 2.829,4.521 2.829,4.351 2.89,4.29
  Bottom Layer w0.4: 3.175,9 3.2,9.025 v1(3.675,9.025)
  other v1: 1.59,1.115 2.1,1.75 1,4.25 2.125,4.45 1.1,5.35 3.3,5.45 1.566,5.785 2.7,5.85 3.3,6.25
INA_OUT: M1.11 R3.2 U1.1 | length 5.6
  Top Layer w0.15: R3.2 1.371,13.846 1.196,13.593 1.139,13.511 1.264,13.511 1.375,13.4 1.375,13.275 1.62,13.03 2.92,13.03 3.45,12.5 U1.1@3.45,11.2
  Top Layer w0.2: M1.11@0.252,13.448 R3.2@0.981,13.448
NetC11_2: C11.2 R9.2 U3.A1 | length 2
  Top Layer w0.15: R9.2@8.275,3.325 8.275,3.075 U3.A1 8.481,2.831 8.481,2.798 8.17,2.487 8.17,2.213 8.317,2.066 8.317,1.92 8.542,1.695 C11.2
NetC12_2: C12.2 R10.2 U3.B1 | length 1.8
  Top Layer w0.15: C12.2 7.89,1.865 7.89,2.713 8,2.823 7.775,3.048 7.775,3.3 R10.2@7.75,3.325
NetR7_2: R7.2 R9.1 | length 0.8
  Top Layer w0.15: R7.2@8.4,3.8 8.475,3.725 8.626,3.725 8.726,3.625 8.726,3.424 R9.1@8.825,3.325
  Top Layer w0.3: R7.2@8.4,3.8 R7.2@8.438,3.838
NetR8_2: R8.2 R10.1 | length 0.8
  Top Layer w0.2: R10.1@7.2,3.27 7.2,3.511 7.206,3.517 7.206,3.556 R8.2
NetR11_1: R11.1 U3.C2 | length 6.3
  Top Layer w0.15: v1(7.05,1.869) 7.098,1.917 7.098,2.147 7.282,2.331 7.481,2.331 U3.C2 ; v1@9.225,3.24 R11.1
  Layer 2 (PWR) w0.15: v1(7.05,1.869) 7.744,1.869 v1@9.225,3.35
  other v1: 9.25,3.24
OP_OUT: M2.5 R5.2 | length 3.6
  Top Layer w0.15: R5.2@7.475,10.525 7.802,10.198 8.972,10.198 9.325,9.844 9.325,9.395 M2.5@10.055,8.665
OP_OUT_G: M1.7 R5.1 | length 7.9
  Top Layer w0.15: M1.7@0.122,8.62 0.925,9.423 0.925,9.8 1.483,10.357 5.393,10.357 5.525,10.225 6.6,10.225 6.803,10.428 6.822,10.428 6.925,10.531 R5.1@6.925,10.55
PGND: C1.2 C4.1 C7.1 C14.1 C15.1 M1.9 M2.1 M2.3 pad.1@2,10.54 pad.1@2,13.08 pad.1@8.25,10.585 pad.1@8.25,13.125 R3.1 U1.2 | length 7.1
  Top Layer w0.2: R3.1@1.379,12.5 1.7,12.5 C14.1@1.75,12.45
  Top Layer w0.3: v1(1.4,11.85) 1.6,11.85 1.6,11.862 ; C14.1@1.75,12.45 C14.1@2.1,12.1 ; v1(4.4,11.15) U1.2@4.4,11.2 ; v1@6.18,11.6 6.5,11.6 6.85,11.95 C15.1@6.85,12.25
  Bottom Layer w0.3: v1(1.4,11.85) 1.419,11.831 1.49,11.831 1.511,11.81 2,11.81 2.972,11.81 ; v1(7.8,11.75) 7.825,11.725 7.875,11.725 7.875,10.96 pad.1@8.25,10.585
  Bottom Layer w0.4: pad.1@2,13.08 2,11.81 2,11.327 2.077,11.25 v1(2.1,11.25)
  other v1: 6.2,11.75 2.1,11.85 6.9,12.325 4.5,12.35 7.8,12.75 4.4,13.35 4.4,13.95 1,14.325
  other v2: 8.697,11.093
PULSE: R7.1 R8.1 U2.6 | length 3.9
  Top Layer w0.2: U2.6@8.112,7.115 7.887,6.89 7.44,6.89 7.083,6.533 7.083,5.461 7.4,5.144 7.4,5.1 7.6,4.9 R7.1@8.4,4.9
PULSE_G: M1.5 R1.1 R2.2 U2.3 | length 2.8
  Top Layer w0.15: M1.5@0.143,6.08 0.663,6.6 R2.2@1.4,6.6 ; R1.1@1.4,7.05 1.465,7.115 U2.3@2.688,7.115
PULSE_IN: M2.7 R11.2 | length 0.4
  Top Layer w0.2: R11.2 9.588,6.5 9.633,6.455
PULSE_OUT: M2.6 U2.7 | length 2.2
  Top Layer w0.2: U2.7@8.112,8.385 8.55,8.385 8.775,8.16 8.775,7.964 9.038,7.7 M2.6@9.945,7.7
PULSEOUT_G: M1.6 U2.2 | length 3
  Top Layer w0.15: M1.6@0.175,7.525 1.715,7.525 2.025,7.836 2.025,8.135 2.275,8.385 U2.2@2.688,8.385
STDN: FB3.2 M2.10 | length 7
  Top Layer w0.2: FB3.2 4.276,2.176 v1(4.488,2.176)
  Layer 2 (PWR) w0.15: v1@4.613,2.176 5.374,2.176 6.651,0.899 7.039,0.899 7.729,1.589 7.86,1.589 8.411,2.14 10.075,2.14 M2.10@10.25,2.315
STDN_G: FB3.1 M1.2 | length 3.1
  Top Layer w0.2: M1.2 2.905,2.27 FB3.1@3.025,2.15
TEMP: FB4.2 M2.11 | length 6.3
  Top Layer w0.2: FB4.2 FB4.2@4.475,0.95
  Layer 2 (PWR) w0.15: v1@4.6,0.95 4.931,0.619 7.155,0.619 7.771,1.235 8.701,1.235 8.785,1.151 10.144,1.151 M2.11@10.25,1.045
  other v1: 4.475,1
TEMP_G: FB4.1 M1.1 | length 3.1
  Top Layer w0.2: M1.1@0.231,1 0.661,0.57 2.645,0.57 FB4.1@3.025,0.95
V5V: C6.2 C8.2 C9.2 C10.2 C13.2 FB1.2 M2.9 U2.8 U3.A2 | length 5
  Top Layer w0.13: 9.27,2.56 9.335,2.625 9.335,2.733 M2.9@10.142,3.54
  Top Layer w0.15: C10.2@9.27,2.42 9.27,2.56
  Top Layer w0.2: U3.A2@8.51,2.34 C10.2@9.166,2.34
  Top Layer w0.25: U2.8@8.112,9.655 8.55,9.655 8.75,9.455 8.75,9.385 C9.2@9.2,8.935
  Top Layer w0.4: FB1.2 4.306,3.256 C8.2@5.619,3.256 ; C8.2@5.744,3.256 v1(5.8,3.2)
  other v1: 6.025,4.45 9.025,9.075
V5V_G: C2.1 C3.2 C5.2 FB1.1 M1.3 R1.2 U2.1 | length 7.3
  Top Layer w0.2: R1.2@1.4,8.15 1.45,8.15 1.55,8.25 1.55,8.436 1.66,8.545 1.66,8.945 1.795,9.081 1.795,9.295 1.93,9.43 2.463,9.43 U2.1@2.688,9.655
  Top Layer w0.3: M1.3 1.11,3.54 1.6,3.05 C3.2 C5.2
  Top Layer w0.4: C3.2@1.6,3.05 1.863,3.312 1.919,3.256 2.844,3.256 FB1.1 2.913,3.312 v1(3.075,3.15)
  other v1: 1.286,2.921 1.5,8.25
V_LASER: C15.2 M2.2 R6.1 U1.4 | length 7.2
  Top Layer w0.15: U1.4@5.25,13.7 5.25,14 5.35,14 5.707,14.357 6.789,14.357 ; 6.79,14.356 7.594,14.356 8.063,13.887 8.663,13.887 R6.1@8.7,13.85
  Top Layer w0.5: R6.1@8.7,13.85 8.725,13.825 8.725,12.275 8.75,12.25 8.84,12.34 M2.2@10.16,12.34
V_LASER_G: C1.1 C14.2 M1.10 R6.2 U1.3 U1.5 | length 9.4
  Top Layer w0.15: U1.5@3.35,13.6 3.35,13.5 3.955,12.895 6.005,12.895 6.185,13.075 7.512,13.075 7.6,13.163 7.6,13.7 R6.2
  Top Layer w0.3: U1.5@3.35,13.6 3.45,13.7 U1.5@3.45,14.1 ; U1.3@5.35,11.2 5.35,10.975 5.5,10.825 5.925,10.825 6,10.75 v1@6,10.85
  Top Layer w0.4: C14.2@2.1,13.9 2.25,14.05 v1(3.075,14.05) 3.4,14.05 U1.5@3.45,14.1
  Layer 2 (PWR) w0.4: M1.10 M1.10@0.269,12.699
  other v1: 5.925,10.85 6.972,13.493 6.77,13.93

## Polygon pours and split planes (outlines as drawn)
PGND on Layer 1 (GND) "NONET_L-01_P-001" (solid, pour order 11): 0,8.62 0.27,8.62 2,10.35 8.52,10.35 10.25,8.62 10.25,14.55 0,14.55
AGND on Layer 1 (GND) "NONET_L-01_P-001" (solid, pour order 9): 10.199,7.85 9.829,7.85 8.9,8.779 8.9,9.75 3.9,9.75 3.9,0.5 10.199,0.5
AGND_G on Layer 1 (GND) "TGA" (solid, pour order 10): 3.475,5.212 3.275,5.012 3.275,0.5 -0.075,0.5 -0.075,7.85 0.821,7.85 0.821,8.86 1.51,8.85 1.51,9.46 2,9.95 3.5,9.95 3.475,9.925
V_LASER_G on Layer 2 (PWR) "NONET_L-01_P-001" (solid, pour order 5): 1.4,11.8 1.27,11.93 0.06,11.93 0.06,12.904 0.086,12.93 0.092,12.924 0.333,12.924 0.34,12.93 1.055,12.93 2.625,14.5 7.25,14.5 7.25,11.8 6.075,10.625 5.875,10.625 4.7,11.8
V5V_G on Layer 2 (PWR) "NONET_L-01_P-001" (solid, pour order 7): -0.016,3.04 0.66,3.04 1.225,2.475 2.95,2.475 3.375,2.9 3.375,4.95 2.375,5.95 2.375,8.225 2.05,8.55 1.3,8.55 1,8.25 1,4.25 0.79,4.04 0.015,4.04
V5V on Layer 2 (PWR) "NONET_L-01_P-001" (solid, pour order 6): 10.25,3.54 8.89,3.54 8.05,2.7 5.65,2.7 5.525,2.825 5.525,4.625 6.025,5.125 6.075,5.075 6.975,5.075 6.975,9 7.65,9.675 8.85,9.675 9.225,9.3 9.225,4.591 9.776,4.04 10.233,4.04 10.233,3.557
PGND on Bottom Layer "NONET_L-01_P-001" (solid, pour order 4): 0,8.62 0.27,8.62 2,10.35 8.52,10.35 10.25,8.62 10.25,14.55 0,14.55
AGND_G on Bottom Layer "TGA" (solid, pour order 0): 3.475,5.212 3.275,5.012 3.275,0.5 -0.075,0.5 -0.075,7.85 0.821,7.85 0.821,8.86 1.51,8.85 1.51,9.2 3.475,9.2
AGND on Bottom Layer "NONET_L-01_P-001" (solid, pour order 8): 8.871,0.5 8.871,0.949 9.476,1.554 9.476,2.915 9.601,3.04 10.199,3.04 10.199,7.85 9.829,7.85 8.9,8.779 8.9,9.2 3.9,9.2 3.9,0.5
AGND on Top Layer "NONET_L-01_P-001" (solid, pour order 3): 10.199,7.85 9.829,7.85 8.9,8.779 8.9,9.75 3.9,9.75 3.9,0.5 10.199,0.5

## Other copper
Top Layer:
  pour cut-out: 7.254,9.21 7.254,7.44 8.9,7.44 8.9,9.21
  pour cut-out: 7.25,2.511 7.245,2.511 7.245,2.901 7.133,3.013 7.507,3.013 7.578,2.942 7.578,2.839
  pour cut-out: 3.9,10.15 7,10.15 7,5.35 3.9,5.35
  region net AGND_G: 1.787,5.2 1.787,5.196 1.962,5.021 1.962,4.292 2.242,4.012 2.67,4.012 3.475,4.817 3.475,5.52 3.21,5.785 1.566,5.785 1.566,5.201 1.567,5.2
Layer 1 (GND):
  pour cut-out: 3.9,10.15 7,10.15 7,5.35 3.9,5.35
Layer 2 (PWR):
  rectangle net V_LASER_G: 0.327,11.93 1.05,12.93
  region net V5V: 10.005,4.04 9.776,4.04 9.501,4.316 9.336,4.151 9.336,3.618 9.793,3.618 10.005,3.83
Bottom Layer:
  pour cut-out: 3.9,10.15 7,10.15 7,5.35 3.9,5.35

## Silkscreen, mask and mechanical layers (free items; w line width, h text height)
Top Overlay:
  text "V1.0" at 6.606,5.5 h1.6 r90
  text "villanif" at 5.183,5.4 h1.6 r90
Bottom Overlay:
  drawing of 83 lines, arcs and shapes, not listed
  text "LD Driver" at 5.017,0.75 h1.6 r270
  text "villanif" at 3.742,0.725 h1.6 r270
Board:
  lines w0.1: 0,0.35 0,0 10.25,0 10.25,0.35 ; 0,14.35 0,14.75 10.25,14.75 10.25,14.35

## Text inside footprints (layer, text, board x,y; h text height)
M1: Board "Board Edge" at -0.3,4.41 h0.6 r90
M2: Board "Board Edge" at 10.55,10.29 h0.6 r270